# Altium PCB HapticRC_IMU_PCB.pcbdoc
Units mil, origin at the board's own origin, x right, y up, seen from the top; angles counter-clockwise.
Board outline 3420 x 2191.1 mil, 2 copper layers (Top Layer, Bottom Layer); 18 components, 18 nets, 98 pads, 12 vias.
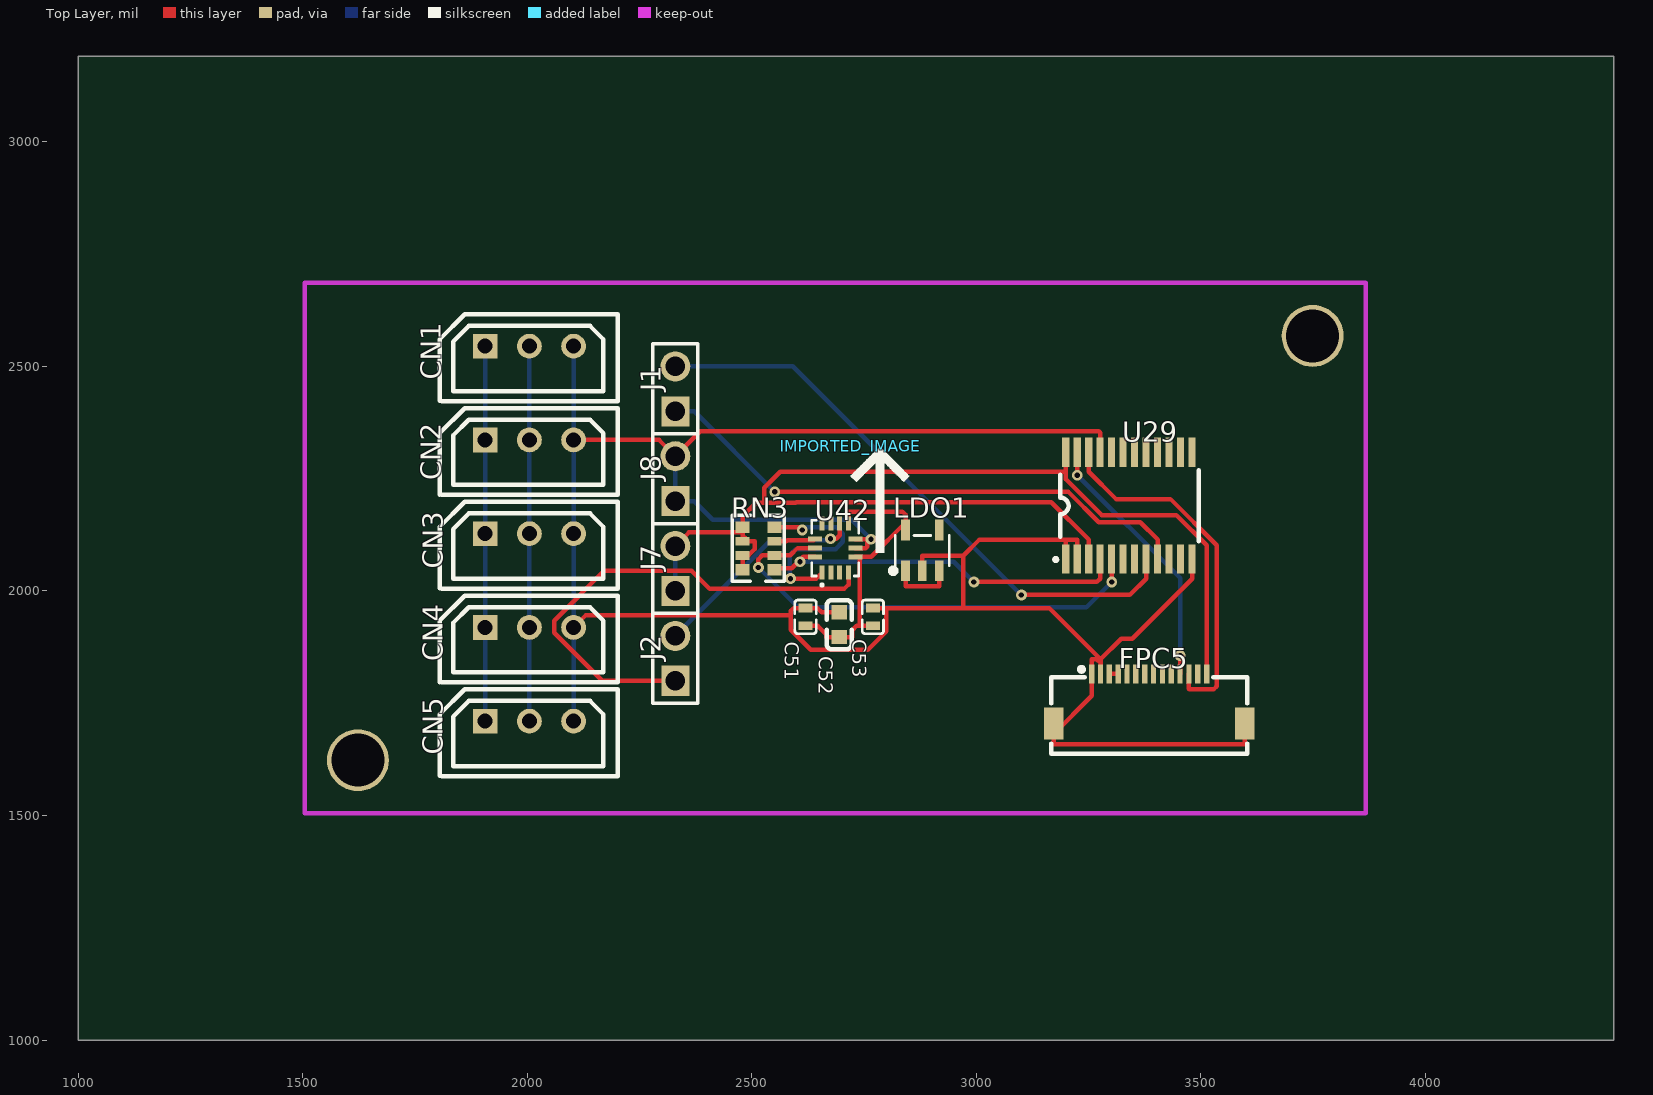
[diagram p0: Top Layer view]
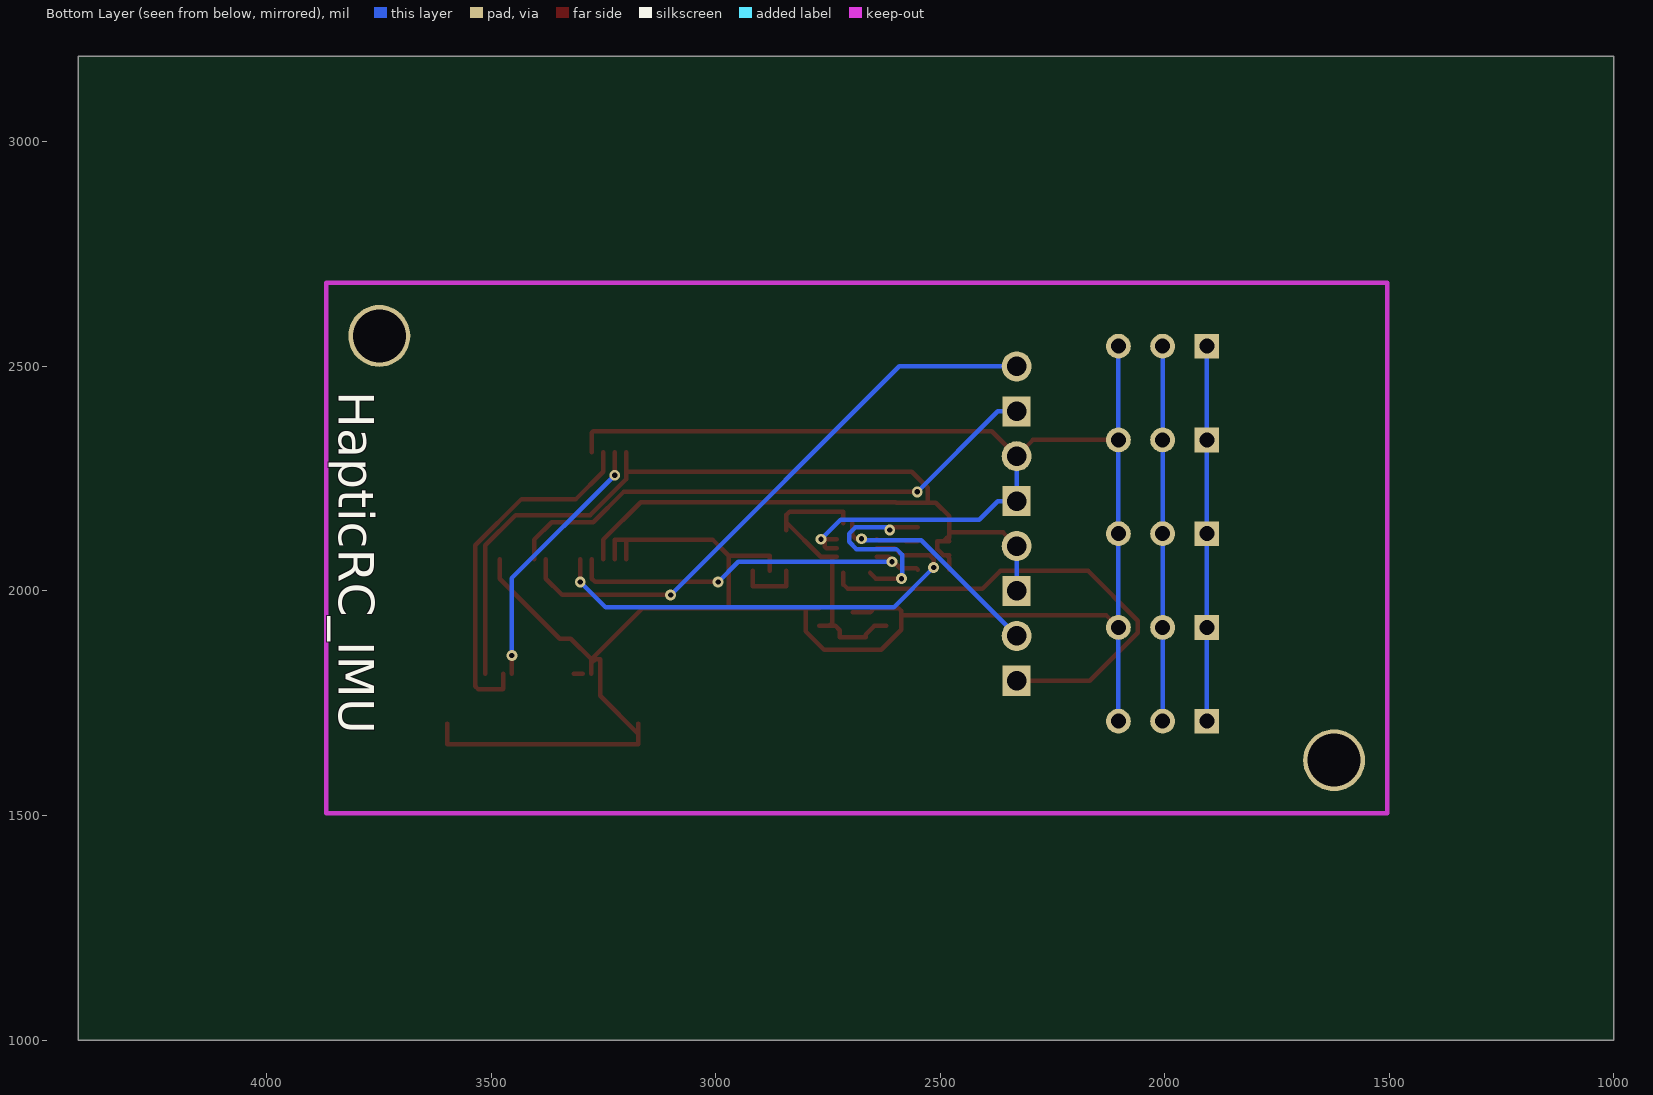
[diagram p1: Bottom Layer view, seen from below]

## Layer stack, top to bottom
Top Layer: signal copper (thickness not stored)
Dielectric: dielectric 12.6, FR-4, Dk 4.8
Bottom Layer: signal copper (thickness not stored)

## Board outline
4420,1000 1000,1000 1000,3191.1 4420,3191.1

## Components (designator, comment, footprint, x,y, rotation, side; value= is the part's Value field where it differs from the comment)
C51 "4.7u" C0402 2619.89,1942.32 r270 top
C52 "100nF" C0603 2695,1925 r90 top
C53 "100n" C0402 2769.89,1942.32 r90 top
CN1 "HC-5264-3A" CONN-TH_3P-P2.50_HCTL_HC-5264-3A 2005,2545 r0 top
CN2 "HC-5264-3A" CONN-TH_3P-P2.50_HCTL_HC-5264-3A 2005,2336.25 r0 top
CN3 "HC-5264-3A" CONN-TH_3P-P2.50_HCTL_HC-5264-3A 2005,2127.5 r0 top
CN4 "HC-5264-3A" CONN-TH_3P-P2.50_HCTL_HC-5264-3A 2005,1918.75 r0 top
CN5 "HC-5264-3A" CONN-TH_3P-P2.50_HCTL_HC-5264-3A 2005,1710 r0 top
FPC5 "FPC-05F-14PH15" FPC-SMD_14P-P0.50_XUNPU_FPC-05F-14PH15 3385,1760 r0 top
IMPORTED_IMAGE "IMPORTED_IMAGE" IMPORTED_IMAGE 2720.04,2321.66 r0 top
J1 "PIN" HDR-M-2.54_1X2 2330,2450 r90 top
J2 "PIN" HDR-M-2.54_1X2 2330,1850 r90 top
J7 "PIN" HDR-M-2.54_1X2 2330,2050 r90 top
J8 "PIN" HDR-M-2.54_1X2 2330,2250 r90 top
LDO1 "ME6211C33M5G-N" SOT-23-5_L3.0-W1.7-P0.95-LS2.8-BL 2880,2090 r0 top
RN3 "3.9kΩ" RES-ARRAY-SMD_0603-8P-L3.2-W1.6-BL 2515,2095 r90 top
U29 "TCA9548APWR" TSSOP-24_L7.8-W4.4-P0.65-LS6.4-BL 3340,2190 r0 top
U42 "BMI160" LGA-14_L3.0-W2.5-P0.50-BL 2686.1,2095.55 r0 top

## Footprints (in the part's own frame and the unit in brackets; to place one, negate y for a bottom-side part, rotate by r counter-clockwise, add the part's x,y. Pads: shape width x height; smd on the part's side, far side on the other; paste and mask are expansions set on the pad)
C0402 [mm]
  rect 0.5x0.8 smd paste+0 mask+0.102: 1(-0.5,0) 2(0.5,0)
  silkscreen extent -0.95,-0.6 0.95,0.6
C0603 [mm]
  rect 0.8x0.9 smd paste+0 mask+0.051: 1(-0.7,0) 2(0.7,0)
  silkscreen extent -1.41,-0.71 1.39,0.72
CONN-TH_3P-P2.50_HCTL_HC-5264-3A [mm]
  rect 1.4x1.4 hole 0.85 paste+0 mask+0.05: 1(-2.5,0)
  round 1.4 hole 0.85 paste+0 mask+0.05: 2(0,0) 3(2.5,0)
  silkscreen extent -5.08,-3.1 5,1.8
FPC-SMD_14P-P0.50_XUNPU_FPC-05F-14PH15 [mm]
  rect 0.3x1.1 smd paste+0 mask+0.05: 1(-3.25,1.4) 2(-2.75,1.4) 3(-2.25,1.4) 4(-1.75,1.4) 5(-1.25,1.4) 6(-0.75,1.4) 7(-0.25,1.4) 8(0.25,1.4) 9(0.75,1.4) 10(1.25,1.4) 11(1.75,1.4) 12(2.25,1.4) 13(2.75,1.4) 14(3.25,1.4)
  rect 1.1x1.8 smd paste+0 mask+0.05: 15(5.4,-1.4) 16(-5.4,-1.4)
  silkscreen extent -5.55,-3.1 5.55,1.79
HDR-M-2.54_1X2 [mm]
  rect 1.7x1.575 hole 1.1 paste+0 mask+0.051: 1(-1.27,0)
  round 1.7 hole 1.1 paste+0 mask+0.051: 2(1.27,0)
  silkscreen extent -2.54,-1.27 2.54,1.27
IMPORTED_IMAGE [mil]
  silkscreen extent 0,-236 131,0
LGA-14_L3.0-W2.5-P0.50-BL [mm]
  rect 0.28x0.785 smd paste+0 mask+0.051: 1(-0.75,-1.393) 2(-0.25,-1.393) 3(0.25,-1.393) 4(0.75,-1.393) 8(0.75,1.393) 9(0.25,1.393) 10(-0.25,1.393) 11(-0.75,1.393)
  rect 0.785x0.28 smd paste+0 mask+0.051: 5(1.142,-0.5) 6(1.142,0) 7(1.142,0.5) 12(-1.142,0.5) 13(-1.142,0) 14(-1.142,-0.5)
  silkscreen extent -1.33,-2.16 1.33,1.58
RES-ARRAY-SMD_0603-8P-L3.2-W1.6-BL [mm]
  rect 0.65x0.8 smd paste+0 mask+0.051: 1(-1.2,-0.9) 4(1.2,-0.9) 5(1.2,0.9) 8(-1.2,0.9)
  rect 0.5x0.8 smd paste+0 mask+0.051: 2(-0.4,-0.9) 3(0.4,-0.9) 6(0.4,0.9) 7(-0.4,0.9)
  silkscreen extent -1.87,-1.45 1.87,1.47
SOT-23-5_L3.0-W1.7-P0.95-LS2.8-BL [mm]
  rect 0.49x1.157 smd paste+0 mask+0.051: 1(-0.95,-1.154) 2(0,-1.154) 3(0.95,-1.154)
  rect 0.49x1.175 smd paste+0 mask+0.051: 4(0.95,1.154) 5(-0.95,1.154)
  silkscreen extent -1.8,-1.29 1.53,0.85
TSSOP-24_L7.8-W4.4-P0.65-LS6.4-BL [mm]
  rect 0.4x1.65 smd paste+0 mask+0.051: 1(-3.575,-3.023) 2(-2.925,-3.023) 3(-2.275,-3.023) 4(-1.625,-3.023) 5(-0.975,-3.023) 6(-0.325,-3.023) 7(0.325,-3.023) 8(0.975,-3.023) 9(1.625,-3.023) 10(2.275,-3.023) 11(2.925,-3.023) 12(3.575,-3.023) 13(3.575,3.023) 14(2.925,3.023) 15(2.275,3.023) 16(1.625,3.023) 17(0.975,3.023) 18(0.325,3.023) 19(-0.325,3.023) 20(-0.975,3.023) 21(-1.625,3.023) 22(-2.275,3.023) 23(-2.925,3.023) 24(-3.575,3.023)
  silkscreen extent -4.24,-3.15 3.94,2.01

## Free pads (board coordinates)
  round 137.79 hole 118.11 paste+0 mask+4: 1(1623.11,1623.11) 1(3749.09,2567.99)

## Via types
v1: diameter 24.02, hole 12.01, Top Layer to Bottom Layer, tented both sides, 12 vias

## Nets (pads, with @x,y where several pads share a name; then routed paths per layer and width w, separated by ;. In a path a pad name is that pad's centre, name@x,y a point inside that pad or via, vN(x,y) a via of type N, cw(c..) or ccw(c..) an arc to the next point about the centre after c; other vN are vias at no path point)
+3V3: FPC5.3 FPC5.4 | length 19.7
  Top Layer w10: FPC5.3 FPC5.4
+5V: FPC5.14 J7.1 J7.2 RN3.5 RN3.6 RN3.7 RN3.8 U29.3 U29.24 | length 2739.6
  Top Layer w10: J7.2 2360.35,2130.35 RN3.5@2479.57,2130.35 ; RN3.8 2479.57,2072.56 RN3.7@2486.26,2079.25 ; RN3.7 RN3.7@2486.26,2079.25 ; RN3.6 RN3.6@2492.94,2110.75 ; U29.24 3199.26,2265.53 ; U29.3 3250.44,2114.47 3167.33,2197.58 2599.48,2197.58 2598.61,2196.71 2527.93,2196.71 ; FPC5.14 3512.95,2101.47 3445.38,2169.04 3279.48,2169.04 3199.26,2249.26 3199.26,2265.53 ; RN3.5@2479.57,2130.35 RN3.5 2479.57,2166.03 2510.25,2196.71 2527.93,2196.71 ; RN3.5@2479.57,2130.35 2479.57,2118.46 2485.23,2118.46 RN3.6@2492.94,2110.75 ; RN3.7@2486.26,2079.25 2492.94,2079.25 2506.31,2092.62 2506.31,2110.75 RN3.6@2492.94,2110.75 ; 2527.93,2196.71 2527.93,2229.59 2563.87,2265.53 3199.26,2265.53
  Bottom Layer w10: J7.1 J7.2
CN5_1: CN1.1 CN2.1 CN3.1 CN4.1 CN5.1 | length 835
  Bottom Layer w10: CN5.1 CN4.1 CN3.1 1906.58,2336.25 CN1.1
CN5_2: CN1.2 CN2.2 CN3.2 CN4.2 CN5.2 | length 835
  Bottom Layer w10: CN5.2 CN4.2 CN3.2 2005.01,2336.25 CN1.2
CS: RN3.4 U42.1 | length 442
  Top Layer w10: RN3.4 2606.28,2142.24 v1(2612.68,2135.84) ; v1(2586.48,2027.44) 2643.28,2027.44 U42.1
  Bottom Layer w10: v1(2586.48,2027.44) 2584.4,2029.52 2584.4,2080.16 2597.64,2093.4 2687,2093.4 2703.01,2109.41 2703.01,2127.9 2688.97,2141.94 2618.78,2141.94 v1(2612.68,2135.84)
GND: C51.1 C52.2 C53.2 CN1.3 CN2.3 CN3.3 CN4.3 CN5.3 FPC5.1 FPC5.2 FPC5.15 FPC5.16 J8.1 J8.2 LDO1.2 U29.1 U29.2 U29.12 U29.21 U42.6 U42.7 | length 5940.3
  Top Layer w10: CN4.3 2130.98,1946.3 2586.63,1946.3 ; CN2.3@2103.43,2336.25 2293.75,2336.25 J8.2 2385.48,2355.48 3273.02,2355.48 3276.03,2352.47 U29.21 ; C52.2 2656.07,1952.56 2646.63,1962 C51.1 2593.15,1962 2586.63,1955.48 2586.63,1946.3 ; U42.6 2754.31,2095.55 2757.52,2098.76 v1@2757.52,2115.24 ; U42.7 v1@2757.52,2115.24 ; v1(2765.76,2115.24) v1@2757.52,2115.24 ; C53.2 2799.9,1962.01 ; LDO1.2 2880,2078.35 2880.07,2078.42 2971.11,2078.42 ; FPC5.16 FPC5.16@3172.4,1681.67 ; U29.1 3199.26,2114.47 ; U29.2 3224.85,2114.47 3199.26,2114.47 ; FPC5.2 3276.73,1831.44 3276.73,1839.61 ; U29.12@3480.75,2071 3480.75,2027.53 3347.09,1893.87 3322.84,1893.87 3276.73,1847.76 ; FPC5.15 3597.6,1658.46 3172.4,1658.46 FPC5.16@3172.4,1681.67 ; 2586.63,1946.3 2586.63,1913.83 2631.54,1868.92 2758.97,1868.92 2799.9,1909.85 2799.9,1962.01 ; 2799.9,1962.01 2971.11,1962.01 ; 2971.11,1962.01 3162.48,1962.01 3276.73,1847.76 ; 2971.11,1962.01 2971.11,2078.42 ; 2971.11,2078.42 3007.16,2114.47 3199.26,2114.47 ; FPC5.16@3172.4,1681.67 3257.05,1766.32 FPC5.1 3257.05,1847.76 3268.58,1847.76 3276.73,1839.61 ; 3276.73,1839.61 3276.73,1847.76
  Bottom Layer w10: CN5.3 CN4.3 CN3.3 2103.43,2336.25 CN1.3 ; J8.2 J8.1 2371.99,2200 2413.09,2158.9 2722.1,2158.9 v1(2765.76,2115.24)
INT1: J2.1 U42.4 | length 1089.5
  Top Layer w10: J2.1 2167.13,1800 2060.18,1906.95 2060.18,1933.79 2170.92,2044.53 2366.51,2044.53 2406.66,2004.38 2705.73,2004.38 2715.63,2014.28 U42.4
INT2: J2.2 U42.9 | length 485.1
  Top Layer w10: v1(2675.53,2116.47) 2688.48,2116.47 2695.94,2123.93 U42.9
  Bottom Layer w10: J2.2 2542.78,2112.78 2671.84,2112.78 v1(2675.53,2116.47)
S$7312: 
SA0: RN3.3 U42.12 | length 92.5
  Top Layer w10: RN3.3@2550.43,2110.75 2577.17,2110.75 2579.2,2112.78 2638.66,2112.78 U42.12
SCL: FPC5.12 U29.22 | length 808
  Top Layer w10: U29.22 3250.44,2265.53 3311.26,2204.71 3432.46,2204.71 3535.7,2101.47 3535.7,1787.99 3529.22,1781.51 3474.55,1781.51 3473.58,1782.48 FPC5.12
SCL2: J1.1 U29.9 | length 1235.7
  Top Layer w10: v1(2551.47,2220.52) 3205.3,2220.52 3272.83,2152.99 3365.46,2152.99 3403.98,2114.47 U29.9
  Bottom Layer w10: J1.1 2371.99,2400 v1(2551.47,2220.52)
SCL_IMU: RN3.2 U29.5 U42.13 | length 1052.7
  Top Layer w10: v1(2515.01,2052.19) 2515.01,2070.57 2523.69,2079.25 2550.43,2079.25 2585.84,2079.25 2602.14,2095.55 U42.13 ; v1(3301.62,2020.02) U29.5
  Bottom Layer w10: v1(2515.01,2052.19) 2603.9,1963.3 3244.9,1963.3 v1(3301.62,2020.02)
SDA: FPC5.11 U29.23 | length 588.8
  Top Layer w10: v1(3224.85,2257.87) U29.23 ; FPC5.11 3453.9,1847.76 v1(3453.91,1856.19)
  Bottom Layer w10: v1(3224.85,2257.87) 3453.91,2028.81 v1(3453.91,1856.19)
SDA2: J1.2 U29.8 | length 1317.8
  Top Layer w10: v1(3100.46,1991.01) 3341.87,1991.01 3378.39,2027.53 U29.8
  Bottom Layer w10: J1.2 2591.47,2500 v1(3100.46,1991.01)
SDA_IMU: RN3.1 U29.4 U42.14 | length 839
  Top Layer w10: RN3.1 2553.17,2050.5 2589.32,2050.5 v1@2605.11,2066.29 ; v1(2607.47,2065.1) 2606.3,2065.1 v1@2605.11,2066.29 ; U42.14 2614.68,2075.87 v1@2605.11,2066.3 ; v1(2994.73,2020) 3268.5,2020 3276.03,2027.53 U29.4
  Bottom Layer w10: v1(2607.47,2065.1) 2949.63,2065.1 v1(2994.73,2020)
VDD_IMU: C51.2 C52.1 C53.1 LDO1.5 U42.5 U42.8 | length 672.5
  Top Layer w10: C51.2 2646.63,1922.63 2666.29,1902.97 2666.29,1897.44 C52.1 2697.41,1897.44 2723.71,1897.44 2723.71,1912.57 2733.44,1922.3 2746.79,1922.3 2747.13,1922.64 ; U42.8 2715.63,2176.82 2835.32,2176.82 2842.6,2169.54 LDO1.5@2842.6,2152.48 ; U42.5 U42.5@2741.12,2075.87 ; C53.1 2747.13,1922.64 ; LDO1.5 LDO1.5@2842.6,2152.48 ; U42.5@2741.12,2075.87 2741.12,1928.65 2747.13,1922.64 ; U42.5@2741.12,2075.87 2765.99,2075.87 LDO1.5@2842.6,2152.48
VIN_2: LDO1.1 LDO1.3 | length 142.4
  Top Layer w10: LDO1.1 2842.6,2010.81 2842.67,2010.74 2917.33,2010.74 2917.4,2010.81 LDO1.3
pads on no net: FPC5.5 FPC5.6 FPC5.7 FPC5.8 FPC5.9 FPC5.10 FPC5.13 LDO1.4 U29.6 U29.7 U29.10 U29.11 U29.13 U29.14 U29.15 U29.16 U29.17 U29.18 U29.19 U29.20 U42.2 U42.3 U42.10 U42.11

## Silkscreen, mask and mechanical layers (free items; w line width, h text height)
Bottom Overlay:
  text "HapticRC_IMU" at 3840,2445 h80 r90